# Altium PCB PCB.PcbDoc (part 1 of 2)
Units mil, origin at the board's own origin, x right, y up, seen from the top; angles counter-clockwise.
Board outline 11660 x 8265 mil, 2 copper layers (Top Layer, Bottom Layer); 173 components, 215 nets, 767 pads, 260 vias.
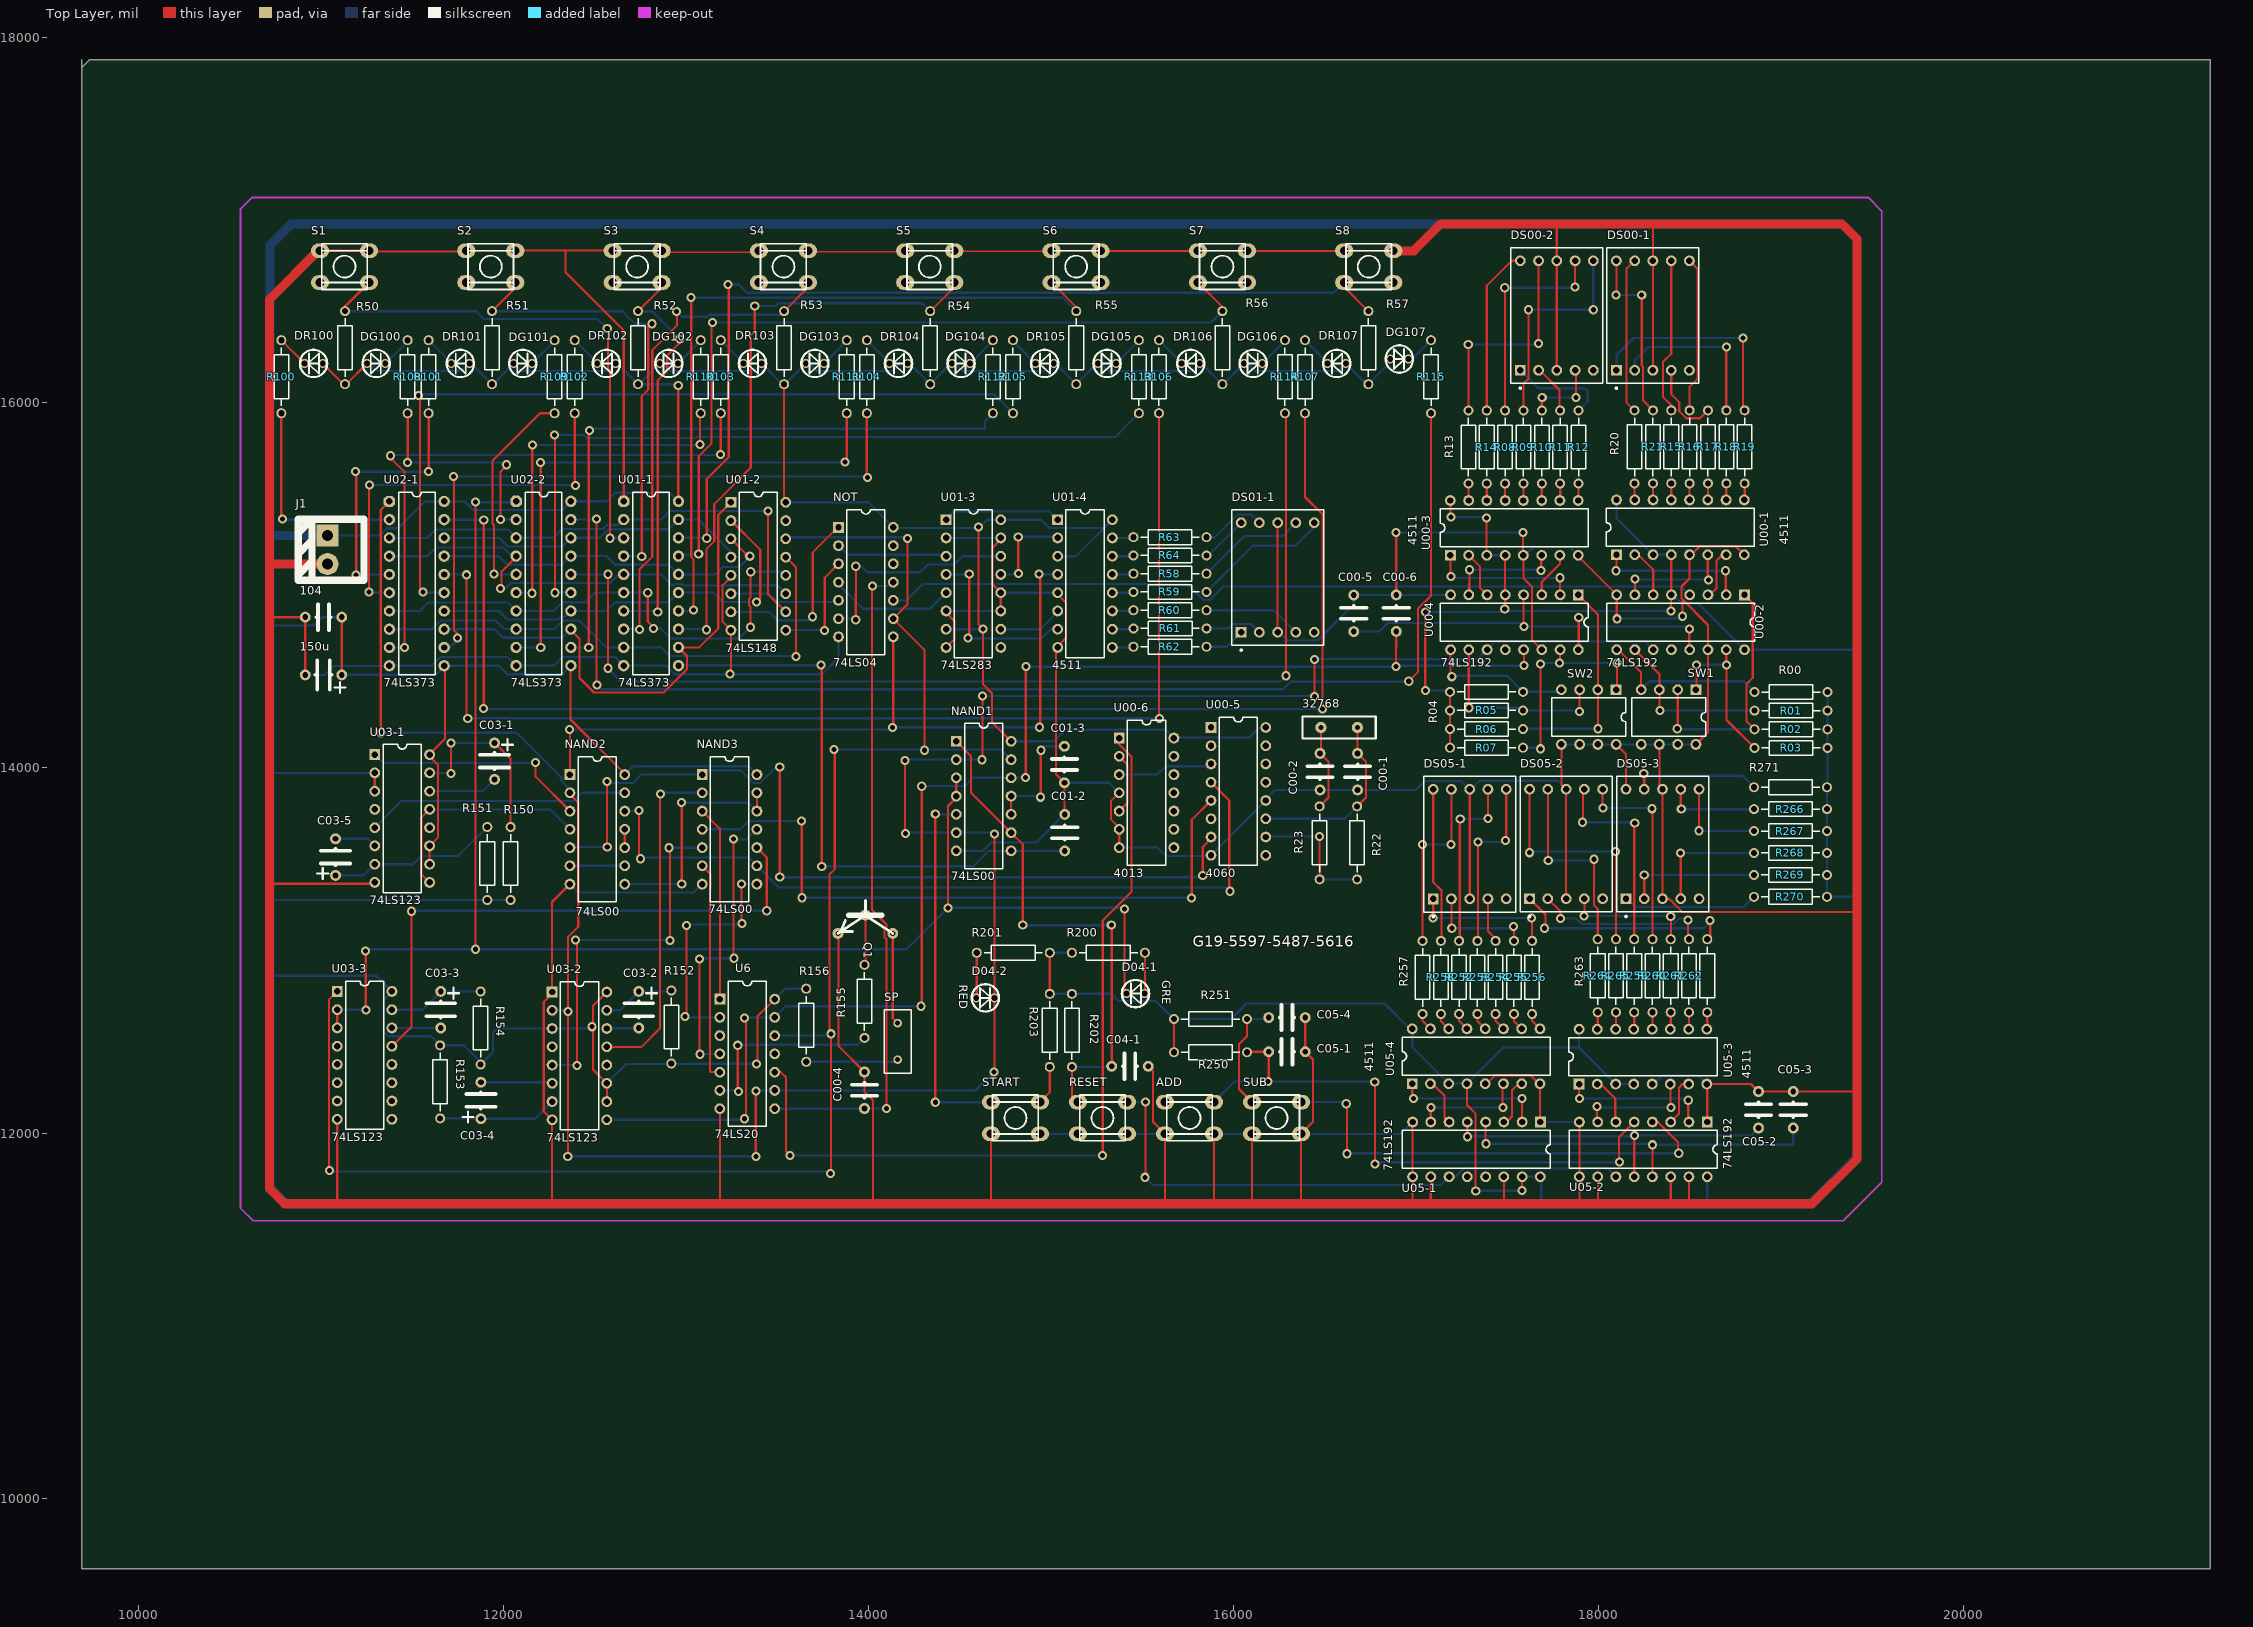
[diagram p0: Top Layer view]
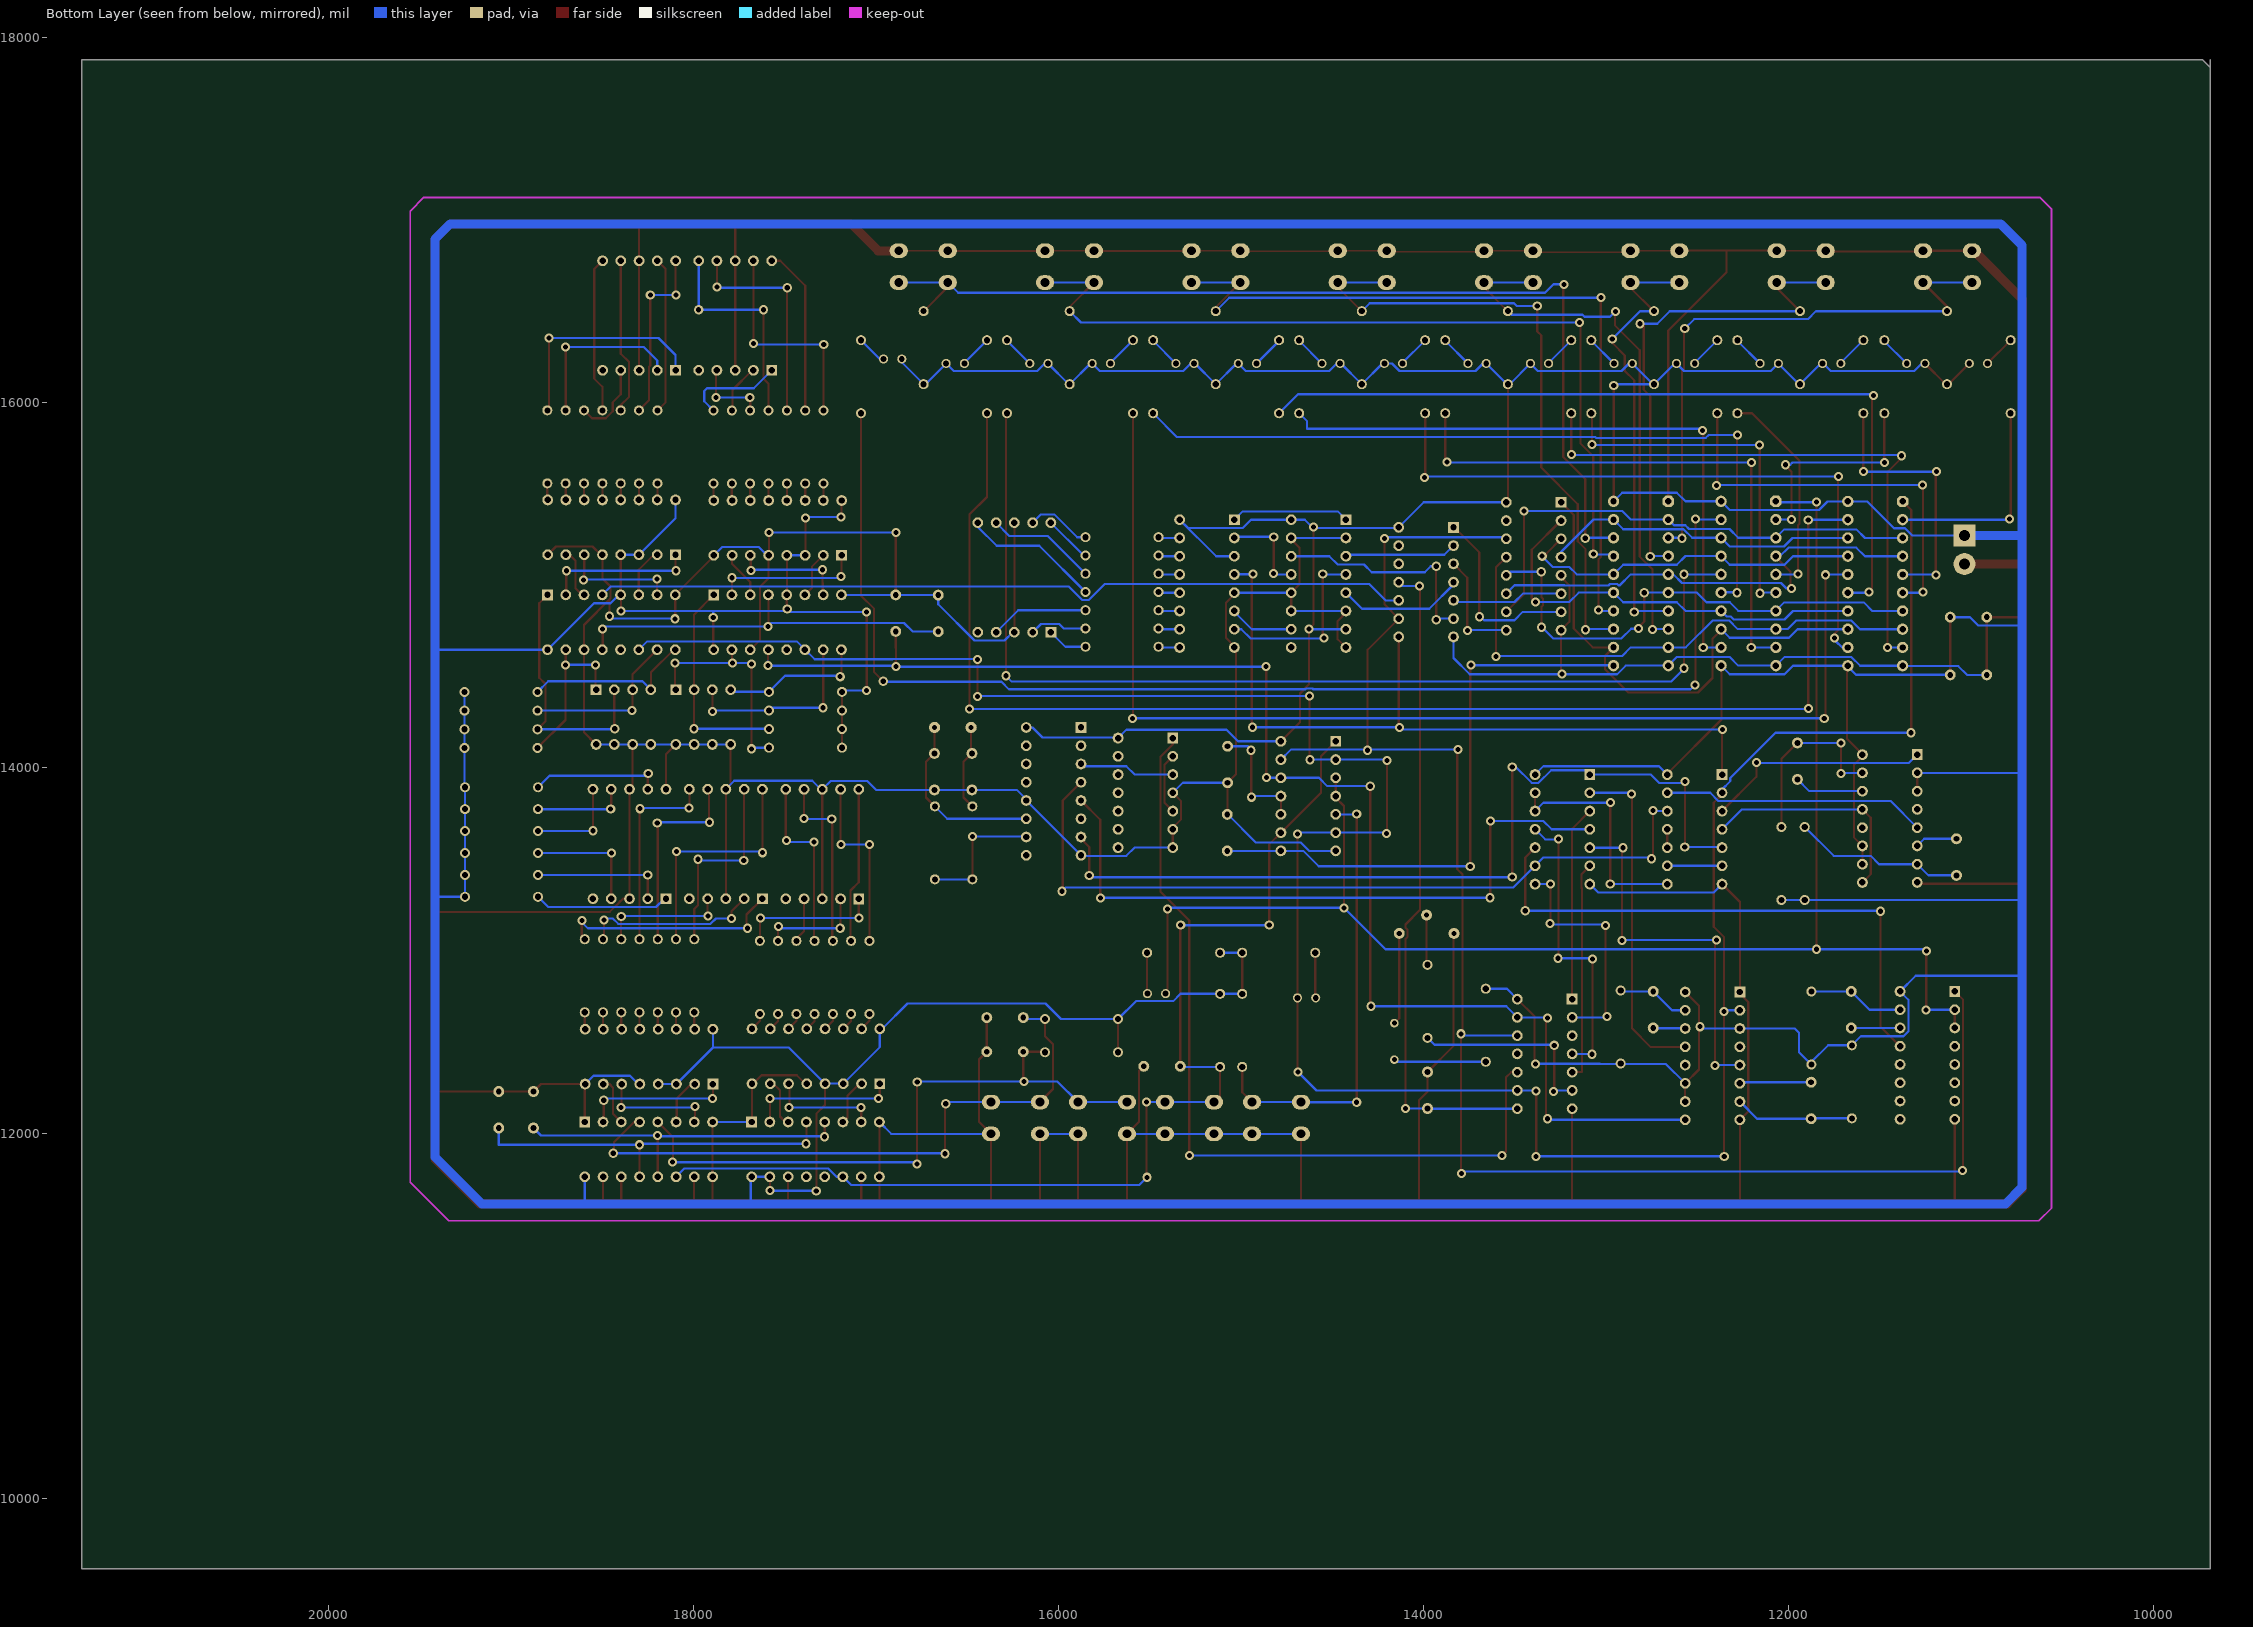
[diagram p1: Bottom Layer view, seen from below]

## Layer stack, top to bottom
Top Layer: signal copper 1.4
Dielectric: dielectric 12.6, FR-4, Dk 4.8
Bottom Layer: signal copper 1.4

## Board outline
9690,17835 9735,17880 21350,17880 21350,9615 9690,9615 9690,17880

## Design rules (kind name [scope] priority, off if disabled: settings)
Clearance [All] p1: gap=10
ComponentClearance [All] p1: gap=1 collisioncheckmode=3 verticalgap=10 showdistances=FALSE
HoleSize [All] p1: absolutevalues=TRUE maxlimit=100 minlimit=0 maxpercent=80.000 minpercent=20.000
PolygonConnect [All] p1: connectstyle=Relief reliefconductorwidth=10 reliefentries=4 polygonreliefangle="90 Angle"
RoutingVias [All] p1: holewidth=28 width=50 viastyle="Through Hole" minholewidth=28 minwidth=50 maxholewidth=28 maxwidth=50
SilkscreenOverComponentPads [All] p1: minsilkscreentomaskgap=10
SolderMaskExpansion [All] p1: expansion=4
TestPointUsage [All] p1: valid=0 allowmultiple=FALSE
Testpoint [All] p1: side=15 testpointundercomponent=TRUE minsize=40 maxsize=100 preferedsize=60 minholesize=0 maxholesize=40 preferedholesize=32 testpointgrid=1 style=1023 order=0-112345678
Width [All] p1: maxlimit=200 minlimit=10 preferedwidth=10 toplayer_prefwidth=12 bottomlayer_prefwidth=12 minimp=50.000000 maximp=50.000000 favimp=50.000000
21 further rules are at their usual default settings.

## Components (designator, comment, footprint, x,y, rotation, side; value= is the part's Value field where it differs from the comment)
104 "Cap" CAP0.2 10915,14826 r90 top
150u "ELECTRO2" CAP-EL 11115,14510 r270 top
32768 "XTAL" XTAL-1 16678,14222 r180 top
ADD "SW-PB" AN-S 15758.33,12083 r180 top
C00-1 "Cap" CAP0.2 16679,14080 r0 top
C00-2 "Cap" CAP0.2 16473.44,14080 r0 top
C00-4 "Cap" CAP0.2 13978,12335 r0 top
C00-5 "Cap" CAP0.2 16658,14947 r0 top
C00-6 "Cap" CAP0.2 16891,14948 r0 top
C01-2 "Cap" CAP0.2 15075,13746 r0 top
C01-3 "Cap" CAP0.2 15073,13919 r180 top
C03-1 "Cap Pol" CAP-EL 11952,14137.58 r0 top
C03-2 "Cap Pol" CAP-EL 12742,12776 r0 top
C03-3 "Cap Pol" CAP-EL 11657,12776 r0 top
C03-4 "Cap Pol" CAP-EL 11877,12079 r180 top
C03-5 "Cap Pol" CAP-EL 11081,13412 r180 top
C04-1 "Cap" CAP0.2 15532,12366 r270 top
C05-1 "Cap" CAP0.2 16392,12446 r270 top
C05-2 "Cap" CAP0.2 18875,12228 r0 top
C05-3 "Cap" CAP0.2 19065,12228 r0 top
C05-4 "Cap" CAP0.2 16392,12633 r270 top
D04-1 "GRE" LED-3 15512.44,12764 r270 top
D04-2 "RED" LED-3 14590.44,12741 r90 top
DG100 "LED" LED-3 11253.6,16215.56 r90 top
DG101 "LED" LED-3 12056.6,16215.56 r90 top
DG102 "LED" LED-3 12856.6,16215.56 r90 top
DG103 "LED" LED-3 13656.6,16215.56 r90 top
DG104 "LED" LED-3 14456.6,16215.56 r90 top
DG105 "LED" LED-3 15256.6,16215.56 r90 top
DG106 "LED" LED-3 16056.6,16215.56 r90 top
DG107 "LED" LED-3 16857.6,16240 r90 top
DR100 "LED" LED-3 11010.58,16215.56 r270 top
DR101 "LED" LED-3 11814.58,16215.56 r270 top
DR102 "LED" LED-3 12614.58,16215.56 r270 top
DR103 "LED" LED-3 13414.58,16215.56 r270 top
DR104 "LED" LED-3 14214.58,16215.56 r270 top
DR105 "LED" LED-3 15014.58,16215.56 r270 top
DR106 "LED" LED-3 15814.58,16215.56 r270 top
DR107 "LED" LED-3 16614.58,16215.56 r270 top
DS00-1 "Dpy Blue-CC" H 18296.58,16478 r0 top
DS00-2 "Dpy Blue-CC" H 17770,16478 r0 top
DS01-1 "Dpy Blue-CC" H 16241,15043.46 r0 top
DS05-1 "Dpy Blue-CC" H 17293,13583 r0 top
DS05-2 "Dpy Blue-CC" H 17821,13584 r0 top
DS05-3 "Dpy Blue-CC" H 18349,13584 r0 top
J1 "CON2" "POWER PLUG2" 11037,15273 r90 top
NAND1 "74LS00" DIP-14 14631,13846 r270 top
NAND2 "74LS00" DIP-14 12515,13664 r270 top
NAND3 "74LS00" DIP-14 13239,13664 r270 top
NOT "74LS04" DIP-14 13985.84,15017.87 r270 top
Q1 "2N3904" NPN-2 13833,13094 r270 top
R00 "Res2" AXIAL-0.4 19053,14416 r180 top
R01 "Res2" AXIAL-0.4 19053,14314 r180 top
R02 "Res2" AXIAL-0.4 19053,14212 r180 top
R03 "Res2" AXIAL-0.4 19053,14110 r180 top
R04 "Res2" AXIAL-0.4 17385,14417 r0 top
R05 "Res2" AXIAL-0.4 17385,14315 r0 top
R06 "Res2" AXIAL-0.4 17385,14213 r0 top
R07 "Res2" AXIAL-0.4 17385,14111 r0 top
R08 "Res2" AXIAL-0.4 17487,15758 r90 top
R09 "Res2" AXIAL-0.4 17587.5,15758 r90 top
R10 "Res2" AXIAL-0.4 17688,15758 r90 top
R11 "Res2" AXIAL-0.4 17788.5,15758 r90 top
R12 "Res2" AXIAL-0.4 17889,15758 r90 top
R13 "Res2" AXIAL-0.4 17286,15758 r90 top
R14 "Res2" AXIAL-0.4 17386.5,15758 r90 top
R15 "Res2" AXIAL-0.4 18397,15759 r90 top
R16 "Res2" AXIAL-0.4 18497.5,15759 r90 top
R17 "Res2" AXIAL-0.4 18598,15759 r90 top
R18 "Res2" AXIAL-0.4 18698.5,15759 r90 top
R19 "Res2" AXIAL-0.4 18799,15759 r90 top
R20 "Res2" AXIAL-0.4 18196,15759 r90 top
R21 "Res2" AXIAL-0.4 18296.5,15759 r90 top
R22 "Res2" AXIAL-0.4 16676.56,13590 r90 top
R23 "Res2" AXIAL-0.4 16471,13590 r90 top
R50 "Res2" AXIAL-0.4 11133,16302 r270 top
R51 "Res2" AXIAL-0.4 11938,16302 r270 top
R52 "Res2" AXIAL-0.4 12738,16302 r270 top
R53 "Res2" AXIAL-0.4 13538,16302 r270 top
R54 "Res2" AXIAL-0.4 14338,16302 r270 top
R55 "Res2" AXIAL-0.4 15138,16302 r270 top
R56 "Res2" AXIAL-0.4 15938,16302 r270 top
R57 "Res2" AXIAL-0.4 16738,16302 r270 top
R58 "Res2" AXIAL-0.4 15651,15064 r0 top
R59 "Res2" AXIAL-0.4 15651,14964 r0 top
R60 "Res2" AXIAL-0.4 15651,14864 r0 top
R61 "Res2" AXIAL-0.4 15652,14764 r0 top
R62 "Res2" AXIAL-0.4 15651,14664 r0 top
R63 "Res2" AXIAL-0.4 15651,15264 r0 top
R64 "Res2" AXIAL-0.4 15651,15164 r0 top
R100 "Res2" AXIAL-0.4 10784,16143 r90 top
R101 "Res2" AXIAL-0.4 11591,16143 r90 top
R102 "Res2" AXIAL-0.4 12391,16143 r90 top
R103 "Res2" AXIAL-0.4 13191,16143 r90 top
R104 "Res2" AXIAL-0.4 13991,16143 r90 top
R105 "Res2" AXIAL-0.4 14791,16143 r90 top
R106 "Res2" AXIAL-0.4 15591,16143 r90 top
R107 "Res2" AXIAL-0.4 16391,16143 r90 top
R108 "Res2" AXIAL-0.4 11476,16143 r90 top
R109 "Res2" AXIAL-0.4 12281,16143 r90 top
R110 "Res2" AXIAL-0.4 13081,16143 r90 top
R111 "Res2" AXIAL-0.4 13881,16143 r90 top
R112 "Res2" AXIAL-0.4 14681,16143 r90 top
R113 "Res2" AXIAL-0.4 15481,16143 r90 top
R114 "Res2" AXIAL-0.4 16281,16143 r90 top
R115 "Res2" AXIAL-0.4 17081,16143 r90 top
R150 "Res2" AXIAL-0.4 12040,13477 r270 top
R151 "Res2" AXIAL-0.4 11912,13477 r270 top
R152 "Res2" AXIAL-0.4 12920,12581 r270 top
R153 "Res2" AXIAL-0.4 11654,12281 r270 top
R154 "Res2" AXIAL-0.4 11876,12576 r270 top
R155 "Res2" AXIAL-0.4 13978,12722 r90 top
R156 "Res2" AXIAL-0.4 13659,12591 r90 top
R200 "Res2" AXIAL-0.4 15314,12988 r0 top
R201 "Res2" AXIAL-0.4 14793,12988 r180 top
R202 "Res2" AXIAL-0.4 15114,12563 r270 top
R203 "Res2" AXIAL-0.4 14993,12563 r270 top
R250 "Res2" AXIAL-0.4 15873,12443 r180 top
R251 "Res2" AXIAL-0.4 15873,12625 r180 top
R252 "Res2" AXIAL-0.4 17235.03,12853 r90 top
R253 "Res2" AXIAL-0.4 17335.03,12853 r90 top
R254 "Res2" AXIAL-0.4 17435.03,12853 r90 top
R255 "Res2" AXIAL-0.4 17535.03,12853 r90 top
R256 "Res2" AXIAL-0.4 17635.03,12853 r90 top
R257 "Res2" AXIAL-0.4 17035.03,12853 r90 top
R258 "Res2" AXIAL-0.4 17135.03,12853 r90 top
R259 "Res2" AXIAL-0.4 18194.03,12862 r90 top
R260 "Res2" AXIAL-0.4 18294.03,12862 r90 top
R261 "Res2" AXIAL-0.4 18394.03,12862 r90 top
R262 "Res2" AXIAL-0.4 18494.03,12862 r90 top
R263 "Res2" AXIAL-0.4 18594.03,12862 r90 top
R264 "Res2" AXIAL-0.4 17994.03,12862 r90 top
R265 "Res2" AXIAL-0.4 18094.03,12862 r90 top
R266 "Res2" AXIAL-0.4 19050,13774.41 r180 top
R267 "Res2" AXIAL-0.4 19050,13654.41 r180 top
R268 "Res2" AXIAL-0.4 19050,13534.41 r180 top
R269 "Res2" AXIAL-0.4 19050,13414.41 r180 top
R270 "Res2" AXIAL-0.4 19050,13294.41 r180 top
R271 "Res2" AXIAL-0.4 19050,13894.41 r180 top
RESET "SW-PB" AN-S 15281.67,12083 r180 top
S1 "SW-PB" AN-S 11130,16746 r0 top
S2 "SW-PB" AN-S 11931.43,16746 r0 top
S3 "SW-PB" AN-S 12732.86,16746 r0 top
S4 "SW-PB" AN-S 13534.29,16746 r0 top
S5 "SW-PB" AN-S 14335.71,16746 r0 top
S6 "SW-PB" AN-S 15137.14,16746 r0 top
S7 "SW-PB" AN-S 15938.57,16746 r0 top
S8 "SW-PB" AN-S 16740,16746 r0 top
SP "SPEAKER" RAD-0.2 14160,12502 r90 top
START "SW-PB" AN-S 14805,12083 r180 top
SUB "SW-PB" AN-S 16235,12083 r180 top
SW1 "SW DIP-4" DIP-8 18382,14279 r180 top
SW2 "SW DIP-4" DIP-8 17945,14279 r180 top
U00-1 "4511" DIP-16 18447.03,15318 r0 top
U00-2 "74LS192" DIP-16 18448.03,14798 r180 top
U00-3 "4511" DIP-16 17537.03,15315 r0 top
U00-4 "74LS192" DIP-16 17538.03,14798 r180 top
U00-5 "4060" DIP-16 16026,13871.87 r270 top
U00-6 "4013" DIP-14 15523,13864 r270 top
U01-1 "74LS373" DIP-20 12659.16,15460.51 r0 top
U01-2 "74LS148" DIP-16 13396.76,15105 r270 top
U01-3 "74LS283" DIP-16 14574.92,15010 r270 top
U01-4 "4511" DIP-16 15186,15010 r270 top
U02-1 "74LS373" DIP-20 11376,15460 r0 top
U02-2 "74LS373" DIP-20 12070.08,15460.51 r0 top
U03-1 "74LS123" DIP-16 11446,13723.13 r270 top
U03-2 "74LS123" DIP-16 12417,12423 r270 top
U03-3 "74LS123" DIP-16 11240,12426 r270 top
U05-1 "74LS192" DIP-16 17330,11911 r180 top
U05-2 "74LS192" DIP-16 18244,11911 r180 top
U05-3 "4511" DIP-16 18242,12419 r0 top
U05-4 "4511" DIP-16 17328,12421 r0 top
U6 "74LS20" DIP-14 13336,12434 r270 top

## Footprints (in the part's own frame and the unit in brackets; to place one, negate y for a bottom-side part, rotate by r counter-clockwise, add the part's x,y. Pads: shape width x height; smd on the part's side, far side on the other; paste and mask are expansions set on the pad)
AN-S [mil]
  oval 100x80 hole 48: 1(-134,87) 1(134,87) 2(-134,-87) 2(134,-87)
  silkscreen extent -125,-125 125,125
AXIAL-0.4 [mm] "Resistor; 2 Leads"
  round 1.4 hole 0.85: 1(-5.08,0) 2(5.08,0)
  silkscreen extent -4.06,-1.02 4.06,1.02
CAP0.2 [mil]
  round 60 hole 32: 1(0,0) 2(0,-200)
  silkscreen extent -70,-140 70,-60
CAP-EL [mil]
  round 60 hole 32: 1(0,0) 2(0,-200)
  silkscreen extent -80,-145 100,20
DIP-8 [mm] "DIP; 8 Leads; Row Spacing 7.62 mm; Pitch 2.54 mm"
  rect 1.5x1.5 hole 0.9: 1(-3.81,-3.81)
  round 1.5 hole 0.9: 2(-1.27,-3.81) 3(1.27,-3.81) 4(3.81,-3.81) 5(3.81,3.81) 6(1.27,3.81) 7(-1.27,3.81) 8(-3.81,3.81)
  silkscreen extent -5.15,-2.65 5.15,2.65
DIP-14 [mm] "DIP; 14 Leads; Row Spacing 7.62 mm; Pitch 2.54 mm"
  rect 1.5x1.5 hole 0.9: 1(-7.62,-3.81)
  round 1.5 hole 0.9: 2(-5.08,-3.81) 3(-2.54,-3.81) 4(0,-3.81) 5(2.54,-3.81) 6(5.08,-3.81) 7(7.62,-3.81) 8(7.62,3.81) 9(5.08,3.81) 10(2.54,3.81) 11(0,3.81) 12(-2.54,3.81) 13(-5.08,3.81) 14(-7.62,3.81)
  silkscreen extent -10.1,-2.65 10.1,2.65
DIP-16 [mm] "DIP; 16 Leads; Row Spacing 7.62 mm; Pitch 2.54 mm"
  rect 1.5x1.5 hole 0.9: 1(-8.89,-3.81)
  round 1.5 hole 0.9: 2(-6.35,-3.81) 3(-3.81,-3.81) 4(-1.27,-3.81) 5(1.27,-3.81) 6(3.81,-3.81) 7(6.35,-3.81) 8(8.89,-3.81) 9(8.89,3.81) 10(6.35,3.81) 11(3.81,3.81) 12(1.27,3.81) 13(-1.27,3.81) 14(-3.81,3.81) 15(-6.35,3.81) 16(-8.89,3.81)
  silkscreen extent -10.3,-2.65 10.3,2.65
DIP-20 [mil]
  oct 62x62 hole 35: 1(0,0)
  round 62 hole 35: 2(0,-100) 3(0,-200) 4(0,-300) 5(0,-400) 6(0,-500) 7(0,-600) 8(0,-700) 9(0,-800) 10(0,-900) 11(300,-900) 12(300,-800) 13(300,-700) 14(300,-600) 15(300,-500) 16(300,-400) 17(300,-300) 18(300,-200) 19(300,-100) 20(300,0)
  silkscreen extent 50,-950 250,50
H [mm] "LED, 7-Segment Display, 14.2 mm, RHD; 10 Leads; Row Space 15.24 mm; Pitch 2.54 mm"
  rect 1.5x1.5 hole 0.9: 1(-5.08,-7.62)
  round 1.5 hole 0.9: 2(-2.54,-7.62) 3(0,-7.62) 4(2.54,-7.62) 5(5.08,-7.62) 6(5.08,7.62) 7(2.54,7.62) 8(0,7.62) 9(-2.54,7.62) 10(-5.08,7.62)
  silkscreen extent -6.4,-10.22 6.4,9.45
LED-3 [mil]
  round 50 hole 32: 1(0,0) 2(0,-100)
  silkscreen extent -75,-125 75,25
NPN-2 [mil]
  round 60 hole 28: 1(0,0) 2(-100,150) 3(0,300)
  silkscreen extent -180,0 0,300
"POWER PLUG2" [mil]
  rect 120x120 hole 60: 1(0,0)
  round 120 hole 60: 2(-156,0)
  silkscreen extent -245,-200 90,160
RAD-0.2 [mm] "Jumper Wire; 2 Leads"
  round 1.2 hole 0.7: 1(-2.54,0) 2(2.54,0)
  silkscreen extent -4.44,-1.91 4.44,1.91
XTAL-1 [mil]
  round 62 hole 28: 1(0,0) 2(200,0)
  silkscreen extent -100,-60 300,60

## Part data
104 C00-1 C00-2 C00-4 C00-5 C00-6 C01-2 C01-3 C04-1 C05-1 C05-2 C05-3 C05-4: "Capacitor"
150u: "Electrolytic Capacitor"
32768: "Crystal Oscillator"
ADD RESET S1 S2 S3 S4 S5 S6 S7 S8 START SUB: "Switch"
C03-1 C03-2 C03-3 C03-4 C03-5: "极性电解电容"
D04-1 D04-2: library part LED1, "Typical RED GaAs LED"
DG100 DG101 DG102 DG103 DG104 DG105 DG106 DG107 DR100 DR101 DR102 DR103 DR104 DR105 DR106 DR107: library part LED0, "Typical INFRARED GaAs LED"
DS00-1 DS00-2 DS01-1 DS05-1 DS05-2 DS05-3: "14.2 mm General Purpose Blue 7-Segment Display: CC, RH DP, Gray Surface"
J1: "Connector"
Q1: "NPN General Purpose Amplifier"
R00 R01 R02 R03 R04 R05 R06 R07 R08 R09 R10 R11 R12 R13 R14 R15 R16 R17 R18 R19 R20 R21 R22 R23 R50 R51 R52 R53 R54 R55 R56 R57 R58 R59 R60 R61 R62 R63 R64 R100 R101 R102 R103 R104 R105 R106 R107 R108 R109 R110 R111 R112 R113 R114 R115 R150 R151 R152 R153 R154 R155 R156 R200 R201 R202 R203 R250 R251 R252 R253 R254 R255 R256 R257 R258 R259 R260 R261 R262 R263 R264 R265 R266 R267 R268 R269 R270 R271: "Resistor"
SW1 SW2: "DIP Switch, 4 Position, SPST"
U00-2 U00-4 U05-1 U05-2: library part 74HC192

## Via types
v1: diameter 50, hole 28, Top Layer to Bottom Layer, 260 vias

## Nets (pads, with @x,y where several pads share a name; then routed paths per layer and width w, separated by ;. In a path a pad name is that pad's centre, name@x,y a point inside that pad or via, vN(x,y) a via of type N, cw(c..) or ccw(c..) an arc to the next point about the centre after c; other vN are vias at no path point)
1HZ: U00-6.1 U6.10 | length 4598.3
  Top Layer w12: U6.10@13486,12334 13520,12334 13548,12306 13548,11899 v1(13570,11877) ; v1@15283,11879 15283,13164.98 15440.53,13322.51 15440.53,14060.86 15373,14128.39 U00-6.1@15373,14164
  Bottom Layer w12: v1@13573,11879 13574,11878 v1(15281,11878)
1KHZ: NAND3.4 U00-5.5 | length 3701.2
  Top Layer w12: v1@13634,13282 v1(13634,13709) ; v1@15771,13286 15771,13716.88 U00-5.5@15876,13821.88
  Bottom Layer w12: NAND3.4@13089,13664 13297.94,13664 13343.47,13709.53 13629.53,13709.53 v1@13631,13711 ; v1(13636,13289) 15768,13289 v1(15769,13288)
2KHZ: NAND2.5 NAND3.1 U00-5.7 | length 4763.3
  Top Layer w12: v1@12564,13568 12567,13571 v1(12567,13926) ; v1@13514,13398 v1(13514,14006) ; v1@15830.47,13415 15830.47,13567.4 15876,13612.93 U00-5.7@15876,13621.88
  Bottom Layer w12: NAND2.5@12365,13564 12369,13568 v1(12569,13568) ; v1@12569.53,13918.47 12710.53,13918.47 12756.06,13964 NAND3.1@13089,13964 13112.53,13987.53 13301.09,13987.53 13370.14,13918.47 13407.86,13918.47 13498.91,14009.53 v1@13518.53,14009.53 ; v1(13514,13402) 15822,13402 v1(15831,13411)
512HZ: NAND2.12 NAND3.9 U00-5.4 | length 4288.3
  Top Layer w12: v1@12743,13503 v1(12743,13767) ; U00-5.4@15876,13921.88 15976,13821.88 v1@15976,13329
  Bottom Layer w12: NAND2.12@12665,13764 12744,13764 v1@12746,13766 ; v1(12751,13503) 12757.53,13509.53 13343.47,13509.53 NAND3.9@13389,13464 13507,13346 15959,13346 v1(15980,13325)
AL1: NAND3.11 U6.4 | length 1634.2
  Top Layer w12: v1(13075,12954) 13075,12434 v1(13077,12432) ; v1@13261,12966 v1(13261,13612)
  Bottom Layer w12: v1@13068,12960 13070,12958 v1(13263,12958) ; v1@13079,12434 U6.4@13186,12434 U6.4@13177,12443 ; v1@13262,13609 13334,13609 NAND3.11@13389,13664
AL3: NAND3.6 U6.5 | length 1203.9
  Top Layer w12: NAND3.6@13089,13464 13134.53,13418.47 13134.53,13342.61 13132,13340.09 13132,12334 U6.5@13186,12334
AL4: NAND3.8 U6.2 | length 1302.7
  Top Layer w12: v1(12996,12638) 13003,12645 v1(13003,13138) ; v1(13305,13365) 13305,13151 v1@13307,13149
  Bottom Layer w12: v1@12998,13143 13303,13143 v1(13308,13148) ; v1@12999,12629 13004,12634 U6.2@13186,12634 ; v1@13308,13362 13310,13364 NAND3.8@13389,13364
BI: NAND2.1 NOT.8 U01-4.4 | length 4270.7
  Top Layer w12: NAND2.1@12365,13964 12365,14210 v1@12366,14211 ; v1@14135.84,14219 NOT.8@14135.84,14717.87 ; v1(14934,15062) 14941,15055 v1@14941,14219
  Bottom Layer w12: v1(12362,14211) 14122,14211 v1(14132,14221) ; v1@14131,14223 v1(14936,14223) ; v1@14937,15061 15035,15061 U01-4.4@15036,15060
D1: U01-1.2 U01-2.10 U02-1.3 U02-2.3 | length 2765.2
  Top Layer w12: v1(13450,15407) 13450,14951.76 U01-2.10@13546.76,14855
  Bottom Layer w12: U02-1.3@11376,15260 11582,15260 11629,15307 12023.59,15307 U02-2.3@12070.08,15260.51 12276.08,15260.51 12324.56,15308.99 12545.9,15308.99 12566.42,15329.51 12628.16,15329.51 U01-1.2@12659.16,15360.51 12865.16,15360.51 12912.16,15407.51 v1@13449.51,15407.51
D2: U01-1.5 U01-2.11 U02-1.4 U02-2.4 | length 2594.4
  Top Layer w12: v1(11985,14983) 11990,14988 11990,15075 12070.08,15155.08 U02-2.4@12070.08,15160.51
  Bottom Layer w12: U02-1.4@11376,15160 11582,15160 11629,15207 12001.08,15207 12051.08,15157 12066.57,15157 U02-2.4@12070.08,15160.51 ; v1(11985,14983) 12012,14983 12042.51,15013.51 12584.49,15013.51 12631.49,15060.51 U01-1.5@12659.16,15060.51 12865.16,15060.51 12926.67,14999 12931.18,14999 12939.69,15007.51 12978.63,15007.51 12987.14,14999 13226.38,14999 13227.91,15000.53 13501.24,15000.53 U01-2.11@13546.76,14955
D3: U01-1.6 U01-2.12 U02-1.7 U02-2.7 | length 2756.5
  Top Layer w12: v1(12791,14960) 12791,14802 v1@12821,14772 ; v1@13343,15061 13353,15051 13353,14933.98 13345,14925.98 13345,14892.02 13353,14884.02 v1(13353,14771)
  Bottom Layer w12: U02-1.7@11376,14860 11542,14860 11589,14907 12023.59,14907 U02-2.7@12070.08,14860.51 12276.08,14860.51 12323.08,14907.51 12449.51,14907.51 12502.51,14960.51 U01-1.6@12659.16,14960.51 v1@12782.51,14960.51 ; v1(12823,14763) 12862.67,14763 12916.2,14709.47 13289.47,14709.47 v1@13346,14766 ; v1(13355,15075) 13526.76,15075 U01-2.12@13546.76,15055
D4: U01-1.9 U01-2.13 U02-1.8 U02-2.8 | length 2926.4
  Top Layer w12: U01-2.13@13546.76,15155 13603,15098.76 v1(13603,14610)
  Bottom Layer w12: U02-1.8@11376,14760 11609,14760 11656,14807 11960,14807 12006.49,14760.51 U02-2.8@12070.08,14760.51 12279.19,14760.51 12326.19,14807.51 12416.49,14807.51 12563.49,14660.51 U01-1.9@12659.16,14660.51 12779.51,14660.51 12865.16,14660.51 12912.16,14613.51 v1@13595.51,14613.51
D5: U01-1.12 U01-2.1 U02-1.13 U02-2.13 | length 2814.6
  Top Layer w12: U02-2.13@12370.08,14760.51 12370.08,14754.51 12417.08,14707.51 12417.08,14492.94 12497.02,14413 12878.11,14413 13006.16,14541.04 13006.16,14613.51 U01-1.12@12959.16,14660.51 13073.49,14660.51 13177,14764.02 13177,15385.24 U01-2.1@13246.76,15455
  Bottom Layer w12: U02-1.13@11676,14760 11952,14760 11998.49,14713.51 12323.08,14713.51 U02-2.13@12370.08,14760.51
D6: U01-1.15 U01-2.2 U02-1.14 U02-2.14 | length 2329.8
  Top Layer w12: U01-2.2@13246.76,15355 13407,15194.76 13407,14930 v1(13386,14909)
  Bottom Layer w12: U02-1.14@11676,14860 11976.59,14860 12023.08,14813.51 12301.08,14813.51 12317.08,14829.51 12339.08,14829.51 U02-2.14@12370.08,14860.51 12565.16,14860.51 12612.16,14907.51 12906.16,14907.51 U01-1.15@12959.16,14960.51 13150.2,14960.51 13201.24,14909.47 v1@13383.47,14909.47
D7: U01-1.16 U01-2.3 U02-1.17 U02-2.17 | length 1944
  Top Layer w12: U01-2.3@13246.76,15255 13328,15173.76 13328,15162 13330,15160 v1(13350,15160)
  Bottom Layer w12: U02-1.17@11676,15160 11976.59,15160 12023.08,15113.51 12323.08,15113.51 U02-2.17@12370.08,15160.51 12565.16,15160.51 12612.16,15113.51 12906.16,15113.51 U01-1.16@12959.16,15060.51 13161.22,15060.51 13201.24,15100.53 13292.53,15100.53 v1@13350,15158
D8: U01-1.19 U01-2.4 U02-1.18 U02-2.18 | length 1752.6
  Bottom Layer w12: U02-1.18@11676,15260 11979.19,15260 12025.68,15213.51 12323.08,15213.51 U02-2.18@12370.08,15260.51 12528.53,15260.51 12575.53,15307.51 12906.16,15307.51 U01-1.19@12959.16,15360.51 13069.47,15360.51 13246.76,15183.22 U01-2.4@13246.76,15155
GND: 104.1 150u.2 ADD.1 C00-1.2 C00-2.2 C00-4.1 C00-5.1 C00-6.1 C01-2.1 C01-3.1 C04-1.1 C05-1.1 C05-2.1 C05-3.1 C05-4.1 DS00-1.3 DS00-1.8 DS00-2.3 DS00-2.8 DS01-1.3 DS01-1.8 DS05-1.3 DS05-1.8 DS05-2.3 DS05-2.8 DS05-3.3 DS05-3.8 DS05-3.10 J1.2 NAND1.7 NAND2.7 NAND3.7 NOT.7 Q1.1 RESET.1 S1.1 S2.1 S3.1 S4.1 S5.1 S6.1 S7.1 S8.1 START.1 SUB.1 SW1.5 SW1.6 SW1.7 SW1.8 SW2.5 SW2.6 SW2.7 SW2.8 U00-1.5 U00-1.8 U00-2.8 U00-2.14 U00-3.5 U00-3.8 U00-4.8 U00-4.14 U00-5.8 U00-5.12 U00-6.4 U00-6.6 U00-6.7 U01-1.1 U01-1.10 U01-2.5 U01-2.8 U01-3.2 U01-3.6 U01-3.8 U01-3.11 U01-3.12 U01-3.15 U01-4.5 U01-4.8 U02-1.10 U02-2.10 U03-1.8 U03-2.1 U03-2.8 U03-3.8 U05-1.1 U05-1.8 U05-1.9 U05-1.10 U05-1.14 U05-2.1 U05-2.8 U05-2.9 U05-2.10 U05-2.14 U05-2.15 U05-3.5 U05-3.8 U05-4.5 U05-4.8 U6.7 | length 68002.2
  Top Layer w10: 10720,15115 10722,15117 ; S1.1@11273,16828 S2.1@11806.43,16828 ; S2.1@11797.43,16833 S2.1@12065.43,16833 ; S2.1@12067.57,16835 S3.1@12601,16835 ; S3.1@12598.86,16833 S3.1@12866.86,16833 ; S3.1@12877,16825 S4.1@13410.43,16825 ; S4.1@13400.29,16833 S4.1@13668.29,16833 ; S4.1@13675.57,16827 S5.1@14209,16827 ; S5.1@14201.71,16833 S5.1@14469.71,16833 ; S5.1@14464.57,16830 S6.1@14998,16830 ; S6.1@15003.14,16833 S6.1@15271.14,16833 ; S6.1@15261.57,16832 S7.1@15795,16832 ; S7.1@15804.57,16833 S7.1@16072.57,16833 ; S7.1@16088.57,16832 S8.1@16622,16832 ; S8.1@16606,16833 S8.1@16874,16833
  Top Layer w12: 10720,13361 10725,13366 11288.87,13366 U03-1.8@11296,13373.13 ; 10720,14819 10727,14826 104.1@10915,14826 150u.2@10915,14510 ; S1.1@10996,16833 S1.1@11264,16833 ; 11085,11613 11090,11618 U03-3.8@11090,12076 ; 12247,11613 12267,11633 U03-2.8@12267,12073 12221.47,12118.53 12221.47,12718.53 12267,12764.06 U03-2.1@12267,12773 12267,13266 NAND2.7@12365,13364 ; 12340,16835 12340,16715 12659.16,16395.84 U01-1.1@12659.16,15460.51 ; U6.7@13186,12134 13186,11621 13194,11613 ; v1(13242,14514) 13246.76,14518.76 U01-2.8@13246.76,14755 13201.24,14800.53 13201.24,15000.53 13246.76,15046.06 U01-2.5@13246.76,15055 ; Q1.1@13833,13094 13835,13092 13835,12478 C00-4.1@13978,12335 13978,12227 14024,12181 14024,11614 14025,11613 ; U01-3.8@14424.92,14660 14470.45,14705.53 14470.45,14805.53 14424.92,14851.06 U01-3.6@14424.92,14860 ; 14671,11613 START.1@14671,11996 ; U01-3.11@14724.92,14860 U01-3.12@14724.92,14960 14679.39,15005.53 14679.39,15205.53 14724.92,15251.06 U01-3.15@14724.92,15260 ; U01-4.5@15036,14960 15036,14951.06 15081.53,14905.53 15081.53,14712.53 15036,14667 U01-4.8@15036,14660 15027,14651 15027,13965 C01-3.1@15073,13919 15073,13748 C01-2.1@15075,13746 ; U00-6.7@15373,13564 U00-6.6@15373,13664 15373,13672.95 15327.47,13718.47 15327.47,13818.47 U00-6.4@15373,13864 ; C04-1.1@15532,12366 15558,12340 15558,12062.33 ADD.1@15624.33,11996 15624.33,11614.33 15623,11613 ; 15888,11613 15892.33,11617.33 ADD.1@15892.33,11996 ; 16094,11613 16101,11620 SUB.1@16101,11996 ; DS01-1.3@16241,14743.46 DS01-1.8@16241,15343.46 ; 16372,11613 16369,11616 SUB.1@16369,11996 16435,12062 16435,12403 C05-1.1@16392,12446 C05-4.1@16392,12633 ; C00-6.1@16891,14948 v1@16891,15289 ; U05-1.8@16980,12061 U05-1.9@16980,11761 16980,11615 16985,11610 ; 17080,11635 U05-1.10@17080,11761 ; DS05-1.3@17293,13283 DS05-1.8@17293,13883 ; U05-4.5@17378,12271 17386.94,12271 17432.47,12316.53 17626.47,12316.53 17672,12271 U05-4.8@17678,12271 U05-1.1@17678,12083 ; U05-1.14@17480,11761 17480,11615 17485,11610 ; v1(17585,15290) 17585,15167.03 U00-3.5@17587.03,15165 ; U00-3.5@17587.03,15157.03 U00-3.5@17587.03,15165 ; U05-1.1@17678,12063 U05-1.1@17680,12061 ; U00-4.14@17688.03,14648 17633.56,14702.47 17633.56,14993.53 17587.03,15040.06 U00-3.5@17587.03,15165 ; 17765,16980 17770,16975 DS00-2.8@17770,16778 DS00-2.3@17770,16178 ; SW2.5@17795,14129 17795,13910 DS05-2.8@17821,13884 DS05-2.3@17821,13284 ; U00-3.8@17887.03,15165 17887.03,15159 U00-2.8@18098.03,14948 18098.03,14869 v1@18098.03,14811.03 ; U05-2.8@17894,12061 U05-2.9@17894,11761 17894,11636 17895,11635 17895,11610 ; 17990,11610 17995,11615 17995,11760 U05-2.10@17994,11761 ; SW2.8@18095,14129 18149,14075 DS05-3.10@18149,13884 ; DS00-1.3@18296.58,16178 DS00-1.8@18296.58,16778 18296.58,16976.58 18300,16980 ; SW1.6@18332,14129 18332,13901 DS05-3.8@18349,13884 DS05-3.3@18349,13284 18385,13284 18403.47,13265.53 18403.47,13265.14 18456.61,13212 19415,13212 ; 18390,11610 18394,11614 U05-2.14@18394,11761 ; v1(18458,14831) 18458,14923.65 18452.5,14929.14 ; U05-2.15@18494,11761 18494,11636 18495,11635 18495,11610 ; SW1.8@18532,14129 18598.03,14195.03 U00-2.14@18598.03,14648 18598.03,14783.61 18452.5,14929.14 ; U05-2.1@18594,12081 18594,12267 U05-3.8@18592,12269 18834,12269 C05-2.1@18875,12228 C05-3.1@19065,12228 19413,12228 19415,12230 ; U00-1.8@18797.03,15168 18751.5,15213.53 18551.5,15213.53 18505.98,15168 U00-1.5@18497.03,15168 18497.03,15038.06 18452.5,14993.53 18452.5,14929.14
  Top Layer w50: 10720,15045 10720,16568 S1.1@10987.5,16835.5 ; 10720,15115 10720,11695 10802,11613 19168,11613 19415,11860 19415,16895 19330,16980 17135,16980 16987,16832 S8.1@16875,16832 ; 10722,15117 J1.2@11037,15117
  Bottom Layer w12: 150u.2@10915,14510 11023,14510 11071,14558 11377,14558 U02-1.10@11380,14555 ; U02-1.10@11376,14560 11608.53,14560 11655.53,14607 12023.59,14607 U02-2.10@12070.08,14560.51 12276.08,14560.51 12323.08,14607.51 12612.16,14607.51 U01-1.10@12659.16,14560.51 12892.69,14560.51 12939.69,14513.51 13746.49,14513.51 13835.84,14602.86 NOT.7@13835.84,14717.87 ; NAND2.7@12365,13364 12410.53,13318.47 13043.47,13318.47 NAND3.7@13089,13364 ; U01-3.6@14424.92,14860 U01-3.11@14724.92,14860 ; U01-3.2@14424.92,15260 U01-3.15@14724.92,15260 ; NAND1.7@14481,13546 14626.89,13546 14672.42,13591.53 14918.53,13591.53 15073,13746 C01-2.1@15075,13746 ; U01-3.12@14724.92,14960 U01-4.5@15036,14960 ; C01-3.1@15073,13919 15318,13919 U00-6.4@15373,13864 ; U00-6.7@15373,13564 15581.94,13564 15627.47,13518.47 15872.6,13518.47 U00-5.8@15876,13521.88 U00-5.12@16176,13821.88 ; ADD.1@15624.33,11996 RESET.1@15415.67,11996 ; ADD.1@15892.33,11996 SUB.1@16101,11996 ; U00-5.12@16176,13828.55 16227.45,13880 C00-2.2@16473.44,13880 C00-1.2@16679,13880 16998.94,13880 17047.47,13928.53 17247.47,13928.53 DS05-1.8@17293,13883 17301.94,13883 17348.47,13929.53 17775.47,13929.53 DS05-2.8@17821,13884 ; DS01-1.3@16241,14743.46 16249.94,14743.46 16295.47,14697.94 16459.86,14697.94 16658,14896.08 C00-5.1@16658,14947 16890,14947 C00-6.1@16891,14948 U00-4.8@17188.03,14948 ; SUB.1@16369,11996 16915,11996 U05-1.8@16980,12061 ; v1(16890,15290) v1(17585,15290) ; U05-4.5@17378,12271 U05-4.5@17386.94,12271 ; U00-3.5@17587.03,15165 17595.98,15165 17641.5,15210.53 17841.5,15210.53 U00-3.8@17887.03,15165 ; U05-1.1@17680,12061 U05-2.8@17894,12061 ; SW2.5@17795,14129 SW2.8@18095,14129 ; 18061,14129 SW1.5@18232,14129 SW1.7@18432,14129 SW1.8@18532,14129 ; v1@18102,14819 18449,14819 v1@18451,14821 ; U05-3.5@18292,12269 18300.94,12269 18346.47,12314.53 18546.47,12314.53 U05-3.8@18592,12269 ; START.1@14671,11996 START.1@14939,11996 ; START.1@14671,11996 START.1@14939,11996 ; START.1@14671,11996 START.1@14939,11996 ; START.1@14939,11996 RESET.1@15147.67,11996 ; RESET.1@15147.67,11996 RESET.1@15415.67,11996 ; RESET.1@15147.67,11996 RESET.1@15415.67,11996
  other v1: 18100,14817
GS: NAND1.13 NOT.9 U01-2.14 U03-3.1 U6.12 | length 9355.9
  Top Layer w12: v1@11044.47,11789 11044.47,11855 11044.47,12730.47 U03-3.1@11090,12776 ; v1@13794,11778 v1(13794,12544) 13787,12551 13787,13418 13815,13446 v1@13815,14104 ; v1(14213,15256) 14213,14895.03 NOT.9@14135.84,14817.87 14306,14647.72 v1(14306,14097)
  Bottom Layer w12: v1(11047,11796) 11053,11790 13780,11790 v1(13791,11779) ; U6.12@13486,12534 v1@13796,12534 ; U01-2.14@13546.76,15255 13555.16,15263.4 v1@14218.6,15263.4 ; v1(13811,14101) 14302,14101 v1(14306,14097) ; v1@14292,14109 14300.53,14100.47 14726.53,14100.47 NAND1.13@14781,14046
Net32768_1: 32768.1 C00-1.1 R22.2 U00-5.11 | length 1000.3
  Top Layer w12: R22.2@16676.56,13790 16725,13838.44 16725,14034 C00-1.1@16679,14080 16678,14081 32768.1@16678,14222
  Bottom Layer w12: U00-5.11@16176,13721.88 16608.44,13721.88 R22.2@16676.56,13790
Net32768_2: 32768.2 C00-2.1 R23.2 | length 473
  Top Layer w12: R23.2@16471,13790 16519.44,13838.44 16519.44,14034 C00-2.1@16473.44,14080 16478,14084.56 32768.2@16478,14222
NetADD_2: ADD.2 C05-1.2 R250.1 U05-2.5 | length 3538.9
  Top Layer w12: R250.1@16073,12443 16076,12446 C05-1.2@16192,12446 16192,12287 v1@16187,12282 ; v1(16775,11831) v1@16775,12283 ; v1@18111,11830 18111,11978 U05-2.5@18194,12061
  Bottom Layer w12: ADD.2@15624.33,12170 ADD.2@15892.33,12170 16005.33,12283 v1(16189,12283) 16770,12283 v1(16773,12280) ; v1@16777,11835 16783,11841 v1(18113,11841)
NetC00-4_2: C00-4.2 NOT.11 U6.8 | length 3640.4
  Top Layer w12: v1(14022,14996) 14020,14994 14020,13222.05 14099,13143.05 14099,13125.05 14087,13113.05 14087,13074.95 14099,13062.95 v1(14099,12135)
  Bottom Layer w12: U6.8@13486,12134 13977,12134 C00-4.2@13978,12135 v1@14097,12135 ; v1@14020,14997 14114.97,14997 NOT.11@14135.84,15017.87
NetC01-2_2: C01-2.2 NAND1.8 U01-1.11 | length 3247.5
  Top Layer w12: v1(13744,13461) v1@13744,14564
  Bottom Layer w12: U01-1.11@12959.16,14563 13738,14563 v1(13740,14565) ; v1@13747,13462 14574,13462 14658,13546 NAND1.8@14781,13546 C01-2.2@15075,13546
NetC01-3_2: C01-3.2 NAND1.10 NAND1.11 | length 652.7
  Top Layer w12: NAND1.10@14781,13746 NAND1.11@14781,13846 ; v1(14942,13840) 14944,13842 v1(14944,14097)
  Bottom Layer w12: NAND1.11@14781,13846 v1@14938,13846 ; v1@14943,14100 14962,14119 C01-3.2@15073,14119
NetC03-1_1: C03-1.1 R150.1 U03-1.15 | length 1027.8
  Top Layer w12: v1(11714,13969) v1(11714,14136) v1@11717,14139 ; C03-1.1@11952,14137.58 12040,14049.58 R150.1@12040,13677
  Bottom Layer w12: U03-1.15@11596,13973.13 v1@11716.87,13973.13 ; v1(11714,14136) 11950.42,14136 C03-1.1@11952,14137.58
NetC03-1_2: C03-1.2 U03-1.14 | length 382.7
  Bottom Layer w12: U03-1.14@11596,13873.13 11887.55,13873.13 C03-1.2@11952,13937.58
NetC03-2_1: C03-2.1 R152.1 U03-2.15 | length 397.7
  Bottom Layer w12: U03-2.15@12567,12673 12639,12673 C03-2.1@12742,12776 12915,12776 R152.1@12920,12781
NetC03-2_2: C03-2.2 U03-2.14 | length 173.4
  Bottom Layer w12: U03-2.14@12567,12573 12568,12574 C03-2.2@12740,12574
NetC03-3_1: C03-3.1 R154.1 U03-3.15 | length 527.4
  Bottom Layer w12: U03-3.15@11390,12676 11557,12676 C03-3.1@11657,12776 R154.1@11876,12776
NetC03-3_2: C03-3.2 U03-3.14 | length 267
  Bottom Layer w12: U03-3.14@11390,12576 C03-3.2@11657,12576
NetC03-4_1: C03-4.1 R153.2 U03-2.7 | length 652.8
  Bottom Layer w12: R153.2@11654,12081 11875,12081 C03-4.1@11877,12079 12173,12079 U03-2.7@12267,12173
NetC03-4_2: C03-4.2 U03-2.6 | length 392.5
  Bottom Layer w12: C03-4.2@11877,12279 12261,12279 U03-2.6@12267,12273
NetC03-5_1: C03-5.1 R151.1 U03-1.7 | length 940.8
  Bottom Layer w12: C03-5.1@11081,13412 11234.87,13412 U03-1.7@11296,13473.13 11504.94,13473.13 11550.47,13518.65 11753.65,13518.65 R151.1@11912,13677
NetC03-5_2: C03-5.2 U03-1.6 | length 231.1
  Bottom Layer w12: C03-5.2@11081,13612 11257.13,13612 U03-1.6@11296,13573.13
NetC05-2_2: C05-2.2 U05-1.5 U05-2.12 | length 1918.3
  Top Layer w12: U05-1.5@17280,12061 17280,11991 v1@17283,11991 ; v1@18193,11992 18194,11991 U05-2.12@18194,11761
  Bottom Layer w12: v1(17281,11980) 17284,11983 18192,11983 v1(18196,11987) 18834,11987 C05-2.2@18875,12028
NetC05-3_2: C05-3.2 U05-1.4 U05-2.13 | length 2073.9
  Top Layer w12: v1@17380,11942 U05-1.4@17380,12061 ; U05-2.13@18294,11761 v1@18294,11937
  Bottom Layer w12: v1(17382,11942) 18288,11942 v1(18294,11936) 19066,11936 19065,11937 C05-3.2@19065,12028
NetC05-4_2: C05-4.2 R251.1 SUB.2 U05-2.4 | length 3493.8
  Top Layer w12: R251.1@16073,12625 16073,12530.12 16029.44,12486.56 16029.44,12241.56 SUB.2@16101,12170 ; v1@16619,12167 16621,12165 v1(16621,11887) ; U05-2.4@18294,12061 18323,12061 18434,11950 v1@18434,11888
  Bottom Layer w12: R251.1@16073,12625 16184,12625 C05-4.2@16192,12633 ; SUB.2@16101,12170 SUB.2@16369,12170 16608,12170 v1(16617,12161) ; v1@16619,11887 16622,11890 v1(18438,11890)
NetD04-1_1: D04-1.1 R200.2 | length 224.6
  Top Layer w12: D04-1.1@15512.44,12764 15514,12765.56 R200.2@15514,12988
NetD04-2_1: D04-2.1 R201.2 | length 248.1
  Top Layer w12: D04-2.1@14590.44,12741 14593,12743.56 R201.2@14593,12988
NetDG100_2: DG100.2 R108.2 | length 178.1
  Bottom Layer w12: DG100.2@11353.6,16215.56 11476,16337.96 R108.2@11476,16343
NetDG101_2: DG101.2 R109.2 | length 179
  Bottom Layer w12: DG101.2@12156.6,16215.56 12281,16339.96 R109.2@12281,16343
NetDG102_2: DG102.2 R110.2 | length 179
  Bottom Layer w12: DG102.2@12956.6,16215.56 13081,16339.96 R110.2@13081,16343
NetDG103_2: DG103.2 R111.2 | length 179
  Bottom Layer w12: DG103.2@13756.6,16215.56 13881,16339.96 R111.2@13881,16343
NetDG104_2: DG104.2 R112.2 | length 179
  Bottom Layer w12: DG104.2@14556.6,16215.56 14681,16339.96 R112.2@14681,16343
NetDG105_2: DG105.2 R113.2 | length 179
  Bottom Layer w12: DG105.2@15356.6,16215.56 15481,16339.96 R113.2@15481,16343
NetDG106_2: DG106.2 R114.2 | length 179
  Bottom Layer w12: DG106.2@16156.6,16215.56 16281,16339.96 R114.2@16281,16343
NetDG107_2: DG107.2 R115.2 | length 166.1
  Bottom Layer w12: DG107.2@16957.6,16240 16978,16240 R115.2@17081,16343
NetDR100_2: DR100.2 R100.2 | length 179.9
  Top Layer w12: R100.2@10784,16343 10910.58,16216.42 DR100.2@10910.58,16215.56
NetDR101_2: DR101.2 R101.2 | length 178.6
  Bottom Layer w12: R101.2@11591,16343 11714.58,16219.42 DR101.2@11714.58,16215.56
NetDR102_2: DR102.2 R102.2 | length 178.6
  Bottom Layer w12: R102.2@12391,16343 12514.58,16219.42 DR102.2@12514.58,16215.56
NetDR103_2: DR103.2 R103.2 | length 178.6
  Bottom Layer w12: R103.2@13191,16343 13314.58,16219.42 DR103.2@13314.58,16215.56
NetDR104_2: DR104.2 R104.2 | length 178.6
  Bottom Layer w12: R104.2@13991,16343 14114.58,16219.42 DR104.2@14114.58,16215.56
NetDR105_2: DR105.2 R105.2 | length 178.6
  Bottom Layer w12: R105.2@14791,16343 14791,16339.14 DR105.2@14914.58,16215.56
NetDR106_2: DR106.2 R106.2 | length 178.6
  Bottom Layer w12: R106.2@15591,16343 15714.58,16219.42 DR106.2@15714.58,16215.56
NetDR107_2: DR107.2 R107.2 | length 178.6
  Bottom Layer w12: R107.2@16391,16343 16514.58,16219.42 DR107.2@16514.58,16215.56
NetDS00-1_1: DS00-1.1 R19.2 | length 1210.7
  Top Layer w12: R19.2@18790,15960 v1(18790,16355)
  Bottom Layer w12: DS00-1.1@18096.58,16178 18096.58,16261.58 18190,16355 v1(18790,16355)
NetDS00-1_2: DS00-1.2 R18.2 | length 931.9
  Top Layer w12: R18.2@18698.5,15959 v1@18698.5,16303.5
  Bottom Layer w12: DS00-1.2@18196.58,16178 18196.58,16231.58 18270,16305 v1(18700,16305)
NetDS00-1_4: DS00-1.4 R17.2 | length 448.5
  Top Layer w12: DS00-1.4@18396.58,16178 18396.58,16046.54 18440.56,16002.56 18440.56,15954.34 18479.46,15915.44 18554.44,15915.44 R17.2@18598,15959 R17.2@18583,15959
NetDS00-1_6: DS00-1.6 R16.2 | length 856.3
  Top Layer w12: DS00-1.6@18496.58,16778 18542.11,16732.47 18542.11,16132.47 18497.5,16087.86 R16.2@18497.5,15959
NetDS00-1_7: DS00-1.7 R15.2 | length 856.9
  Top Layer w12: DS00-1.7@18396.58,16778 18396.58,16269.06 18351.05,16223.53 18351.05,16033.95 18397,15988 R15.2@18397,15959
NetDS00-1_9: DS00-1.9 R20.2 | length 856.5
  Top Layer w12: R20.2@18196,15959 18151.05,16003.95 18151.05,16732.47 DS00-1.9@18196.58,16778
NetDS00-1_10: DS00-1.10 R21.2 | length 982.9
  Top Layer w12: v1@18096.58,16591.58 DS00-1.10@18096.58,16778 ; v1(18235,16590) 18235,16203.97 18242.11,16196.86 18242.11,16013.39 R21.2@18296.5,15959
  Bottom Layer w12: v1(18095,16590) v1(18235,16590)
NetDS00-2_1: DS00-2.1 R12.2 | length 544.9
  Bottom Layer w12: DS00-2.1@17570,16178 17668,16080 17925,16080 17940,16065 17940,16009 R12.2@17889,15958
NetDS00-2_2: DS00-2.2 R11.2 | length 273.2
  Top Layer w12: DS00-2.2@17670,16178 17677,16178 17785,16070 17785,15961.5 R11.2@17788.5,15958
NetDS00-2_4: DS00-2.4 R10.2 | length 405.1
  Top Layer w12: R10.2@17688,15958 v1@17688,16028 ; DS00-2.4@17870,16178 17875,16173 v1(17875,16030)
  Bottom Layer w12: v1(17690,16030) v1(17875,16030)
NetDS00-2_6: DS00-2.6 R09.2 | length 1191.1
  Top Layer w12: R09.2@17587.5,15958 17587.5,16104.44 17615.53,16132.47 v1@17615.53,16514.47
  Bottom Layer w12: v1(17615,16510) v1(17970,16510) DS00-2.6@17970,16778
NetDS00-2_7: DS00-2.7 R08.2 | length 1200.1
  Top Layer w12: R08.2@17487,15958 v1@17487,16633 ; v1@17870,16640 DS00-2.7@17870,16778
  Bottom Layer w12: v1(17485,16630) 17865,16630 v1(17870,16635)
NetDS00-2_9: DS00-2.9 R13.2 | length 1204
  Top Layer w12: R13.2@17286,15958 v1@17286,16324 ; v1(17670,16325) DS00-2.9@17670,16778
  Bottom Layer w12: v1(17285,16320) v1@17670,16320
NetDS00-2_10: DS00-2.10 R14.2 | length 923.5
  Top Layer w12: R14.2@17386.5,15958 17386.5,16641.5 17523,16778 DS00-2.10@17570,16778
NetDS01-1_1: DS01-1.1 R62.2 | length 222.9
  Bottom Layer w12: R62.2@15851,14664 15961.54,14664 DS01-1.1@16041,14743.46
NetDS01-1_2: DS01-1.2 R61.2 | length 318.2
  Bottom Layer w12: R61.2@15852,14764 15970.48,14764 15995.47,14788.99 16095.47,14788.99 DS01-1.2@16141,14743.46
NetDS01-1_4: DS01-1.4 R60.2 | length 539.9
  Bottom Layer w12: R60.2@15851,14864 16220.46,14864 DS01-1.4@16341,14743.46
NetDS01-1_6: DS01-1.6 R59.2 | length 760.9
  Bottom Layer w12: R59.2@15851,14964 16104,15217 16338,15217 16441,15320 DS01-1.6@16441,15343.46
NetDS01-1_7: DS01-1.7 R58.2 | length 605.8
  Bottom Layer w12: R58.2@15851,15064 16058,15271 16268.54,15271 DS01-1.7@16341,15343.46
NetDS01-1_9: DS01-1.9 R63.2 | length 360.6
  Bottom Layer w12: R63.2@15851,15264 15897.15,15264 16022.14,15388.99 16095.47,15388.99 DS01-1.9@16141,15343.46
NetDS01-1_10: DS01-1.10 R64.2 | length 264.3
  Bottom Layer w12: R64.2@15851,15164 15861.54,15164 DS01-1.10@16041,15343.46
NetDS05-1_1: DS05-1.1 R256.2 | length 760.3
  Top Layer w12: DS05-1.1@17093,13283 17093,13185 v1@17095,13183 ; R256.2@17635.03,13064 v1@17635.03,13181.97
  Bottom Layer w12: v1(17091,13179) 17631,13179 v1(17632,13178)
NetDS05-1_2: DS05-1.2 R255.2 | length 562.2
  Top Layer w12: DS05-1.2@17193,13283 17193,13124 v1@17194,13123 ; R255.2@17535.03,13064 v1@17535.03,13123.97
  Bottom Layer w12: v1(17195,13122) 17524,13122 v1(17533,13131)
NetDS05-1_4: DS05-1.4 R254.2 | length 236.4
  Top Layer w12: DS05-1.4@17393,13283 17393,13106.03 R254.2@17435.03,13064
NetDS05-1_6: DS05-1.6 R253.2 | length 974.4
  Top Layer w12: R253.2@17335.03,13064 17338.53,13067.5 17338.53,13596.47 17337,13598 v1@17337,13600 ; DS05-1.6@17493,13883 17493,13601 v1@17494,13600
  Bottom Layer w12: v1(17339,13595) 17482,13595 v1(17489,13602)
NetDS05-1_7: DS05-1.7 R252.2 | length 982.8
  Top Layer w12: R252.2@17235.03,13064 17238.53,13067.5 17238.53,13717.53 v1@17244,13723 ; DS05-1.7@17393,13883 17393,13721 v1@17396,13718
  Bottom Layer w12: v1(17241,13721) 17392,13721 v1(17394,13723)
NetDS05-1_9: DS05-1.9 R257.2 | length 982.1
  Top Layer w12: R257.2@17035.03,13064 17035.03,13578.03 v1@17036,13579 ; v1@17189,13583 17193,13579 DS05-1.9@17193,13883
  Bottom Layer w12: v1(17034,13581) v1(17191,13581)
NetDS05-1_10: DS05-1.10 R258.2 | length 839.3
  Top Layer w12: DS05-1.10@17093,13883 17093,13374.06 17138.53,13328.53 17138.53,13067.5 R258.2@17135.03,13064
NetDS05-2_1: DS05-2.1 R263.2 | length 1235.3
  Top Layer w12: DS05-2.1@17621,13284 17708,13197 v1@17708,13123 ; R263.2@18594.03,13062 18610,13077.97 v1(18610,13164)
  Bottom Layer w12: v1(17703,13122) 18577,13122 18610,13155 v1(18610,13164)